# Altium PCB 2P terminal.pcbdoc
Units mm, origin at the board's own origin, x right, y up, seen from the top; angles counter-clockwise.
Board outline 36.25 x 36.73 mm, 2 copper layers (Top Layer, Bottom Layer); 1 components, 0 nets, 2 pads, 0 vias.
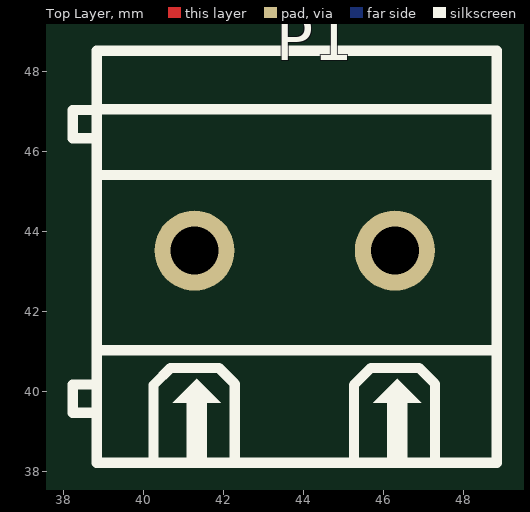
[diagram p0: Top Layer view]
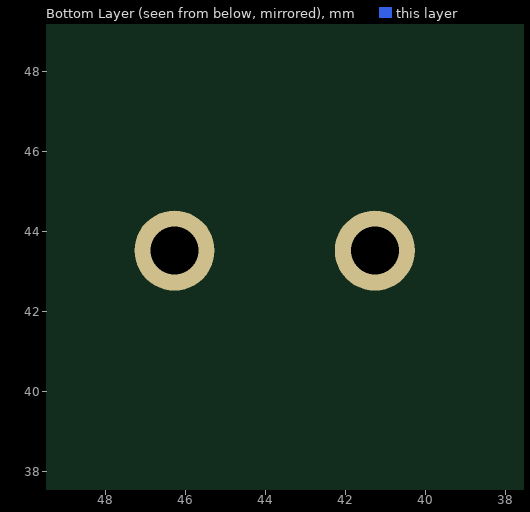
[diagram p1: Bottom Layer view, seen from below]

## Layer stack, top to bottom
Top Layer: signal copper (thickness not stored)
Dielectric: dielectric 0.32, FR-4, Dk 4.8
Bottom Layer: signal copper (thickness not stored)

## Board outline
61.654,25.4 25.4,25.4 25.4,62.133 61.654,62.133

## Components (designator, comment, footprint, x,y, rotation, side; value= is the part's Value field where it differs from the comment)
P1 "CONN-TH_2P-P5.00_WJ128V-5.0-2P" CONN-TH_2P-P5.00_WJ128V-5.0-2P 43.777,43.527 r0 top

## Footprints (in the part's own frame and the unit in brackets; to place one, negate y for a bottom-side part, rotate by r counter-clockwise, add the part's x,y. Pads: shape width x height; smd on the part's side, far side on the other; paste and mask are expansions set on the pad)
CONN-TH_2P-P5.00_WJ128V-5.0-2P [mm]
  round 2 hole 1.2 paste+0 mask+0.051: 1(-2.504,0) 2(2.504,0)
  silkscreen extent -5.55,-5.4 5.05,5

## Nets (pads, with @x,y where several pads share a name; then routed paths per layer and width w, separated by ;. In a path a pad name is that pad's centre, name@x,y a point inside that pad or via, vN(x,y) a via of type N, cw(c..) or ccw(c..) an arc to the next point about the centre after c; other vN are vias at no path point)
pads on no net: P1.1 P1.2